# EAGLE board speech process (EAGLE 7.6.0)
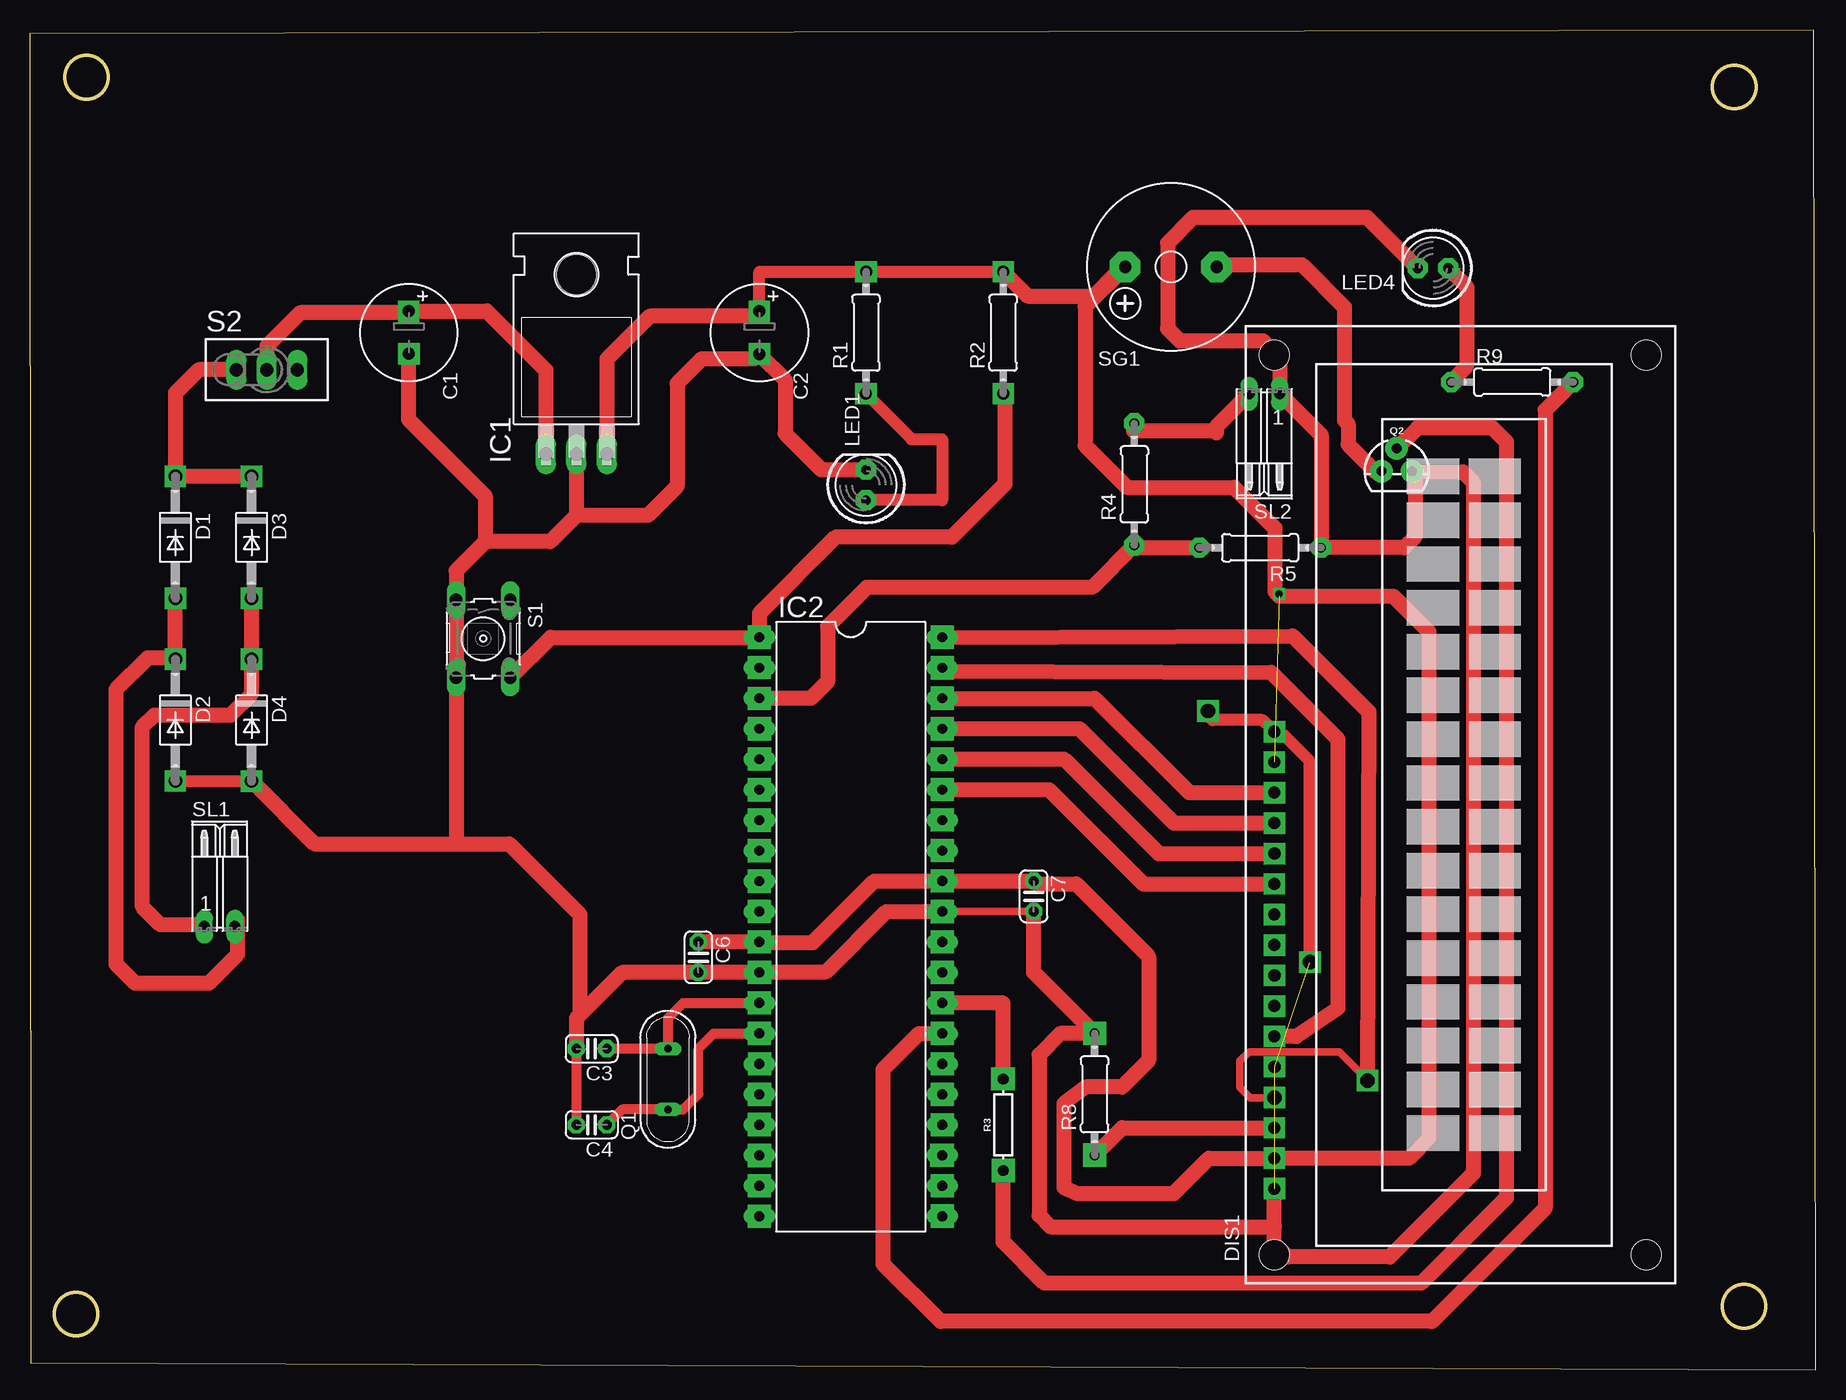
[diagram p0: board, top side]

Size 148.82 x 111.67 mm. Coordinates in mm from the lower left corner, seen from the top.
Outline: 0.08,0.55 148.82,0 148.63,111.67 0,111.36 0.08,0.55
Outline: circle at 4.71,107.74 radius 1.8
Outline: circle at 3.84,4.63 radius 1.8
Outline: circle at 142.84,5.27 radius 1.8
Outline: circle at 142.01,106.91 radius 1.8
Copper layers (1*16): Top 0.035mm / dielectric 1.5mm / Bottom 0.035mm
Design rules "default": minimum track width 10mil, minimum drill 24mil, track to track 8mil, track to pad 8mil, pad to pad 8mil, via to via 8mil, smd to smd 8mil, copper to edge 40mil, drill to drill 8mil, minimum pad ring 10mil, minimum via ring 8mil, stop-mask expansion 4mil, vias tented up to drill 0mil, thermal gap 10mil

## Footprints (pad centres in the part's own frame; a part is rotated, then mirrored left to right if it is on the bottom)
E3,5-8 = drill 0.813 pad 1.6: + -1.778,0 | drill 0.813 pad 1.6 octagon: - 1.778,0
C025-024X044 = drill 0.813 pad 1.422 octagon: 1 -1.27,0; 2 1.27,0
DO41-10 = drill 1.118: A 5.08,0; C -5.08,0
TUXGR_16X2_R2 = drill 1 pad 1.676: 1 -32,15.5; 2 -29.46,15.5; 3 -26.92,15.5; 4 -24.38,15.5; 5 -21.84,15.5; 6 -19.3,15.5; 7 -16.76,15.5; 8 -14.22,15.5; 9 -11.68,15.5; 10 -9.14,15.5; 11 -6.6,15.5; 12 -4.06,15.5; 13 -1.52,15.5; 14 1.02,15.5; 15 3.56,15.5; 16 6.1,15.5 | hole 2.5: -37.5,-15.5; 37.5,-15.5; -37.5,15.5; 37.5,15.5
TO220H = drill 1.118 long: 1 -2.54,-10.16; 2 0,-10.16; 3 2.54,-10.16 | hole 3.302: 0,4.826
DIL40 = drill 0.813 long: 1 -24.13,-7.62; 2 -21.59,-7.62; 3 -19.05,-7.62; 4 -16.51,-7.62; 5 -13.97,-7.62; 6 -11.43,-7.62; 7 -8.89,-7.62; 8 -6.35,-7.62; 9 -3.81,-7.62; 10 -1.27,-7.62; 11 1.27,-7.62; 12 3.81,-7.62; 13 6.35,-7.62; 14 8.89,-7.62; 15 11.43,-7.62; 16 13.97,-7.62; 17 16.51,-7.62; 18 19.05,-7.62; 19 21.59,-7.62; 20 24.13,-7.62; 21 24.13,7.62; 22 21.59,7.62; 23 19.05,7.62; 24 16.51,7.62; 25 13.97,7.62; 26 11.43,7.62; 27 8.89,7.62; 28 6.35,7.62; 29 3.81,7.62; 30 1.27,7.62; 31 -1.27,7.62; 32 -3.81,7.62; 33 -6.35,7.62; 34 -8.89,7.62; 35 -11.43,7.62; 36 -13.97,7.62; 37 -16.51,7.62; 38 -19.05,7.62; 39 -21.59,7.62; 40 -24.13,7.62
LED5MM = drill 0.813 pad 1.676 octagon: A -1.27,0; K 1.27,0
QS = drill 0.61 long: 1 -2.54,0; 2 2.54,0
TO-92 = drill 0.813 pad 1.88: 1 -1.27,0; 2 0,1.905; 3 1.27,0
0207/10 = drill 0.813 pad 1.676 octagon: 1 -5.08,0; 2 5.08,0
AXIAL-0.3 = drill 0.9 pad 1.88: P$1 -3.81,0; P$2 3.81,0
B3F-10XX = drill 1.016 long: 1 -3.251,2.261; 2 3.251,2.261; 3 -3.251,-2.261; 4 3.251,-2.261
TL3XPO = drill 1.1 pad 1.422 long: 1 -2.54,0; 2 0,0; 3 2.54,0
F/CM12P = drill 1.016 pad 2.54 octagon: + 3.81,0; - -3.81,0
02PA = drill 0.914 long: 1 -1.27,0; 2 1.27,0

## Placement (x,y rotation side)
C1  [E3,5-8]  31.57,86.44 270 top
C2  [E3,5-8]  60.78,86.44 270 top
C3  [C025-024X044]  46.81,26.75 180 top
C4  [C025-024X044]  46.81,20.4 180 top
C6  [C025-024X044]  55.7,34.37 270 top
C7  [C025-024X044]  83.64,39.45 270 top
D1  1N4004  [DO41-10]  12.11,69.38 270 top
D2  1N4004  [DO41-10]  12.11,54.14 270 top
D3  1N4004  [DO41-10]  18.46,69.38 270 top
D4  1N4004  [DO41-10]  18.46,54.14 270 top
DIS1  TUXGR_16X2_R2  [TUXGR_16X2_R2]  119.2,47.07 90 top
IC1  7805T  [TO220H]  45.54,86.44 0 top
IC2  PIC18F4550_40  [DIL40]  68.4,36.91 270 top
LED1  [LED5MM]  69.67,73.74 90 top
LED4  [LED5MM]  116.93,91.82 180 top
Q1  [QS]  53.16,24.21 90 top
Q2  600mA/40V  [TO-92]  113.89,74.89 0 top
R1  [0207/10]  69.67,86.44 90 top
R2  10k  [0207/10]  81.1,86.44 90 top
R3  10k  [AXIAL-0.3]  81.1,20.4 90 top
R4  10k  [0207/10]  92.03,73.79 90 top
R5  10k  [0207/10]  102.51,68.51 180 top
R8  10k  [0207/10]  88.72,22.94 90 top
R9  470 E  [0207/10]  123.51,82.32 0 top
S1  [B3F-10XX]  37.77,60.92 270 top
S2  TL37PO  [TL3XPO]  19.73,83.34 0 top
SG1  F/CM12P  [F/CM12P]  95.07,91.92 180 top
SL1  [02PA]  15.8,36.93 0 top
SL2  [02PA]  102.87,81.35 180 top

## Library data of the parts
C1-C4 C6 C7 IC1 LED1 LED4 R1 R2 R4 R5 R8 R9 = adafruit
D1-D4 = diode
DIS1 = display-lcd; OC_FARNELL: unknown; OC_NEWARK: unknown
IC2 = microchip; MF: MICROCHIP; MPN: PIC18F4550-I/P; OC_FARNELL: 9321357; OC_NEWARK: 74K8623
Q1 = special
Q2 = SparkFun-DiscreteSemi; PROD_ID: TRANS-09536
R3 = SparkFun-Resistors; PROD_ID: RES-12183
S1 = switch-omron; MPN: B3F-1000; OC_FARNELL: 176432; OC_NEWARK: 36M3542
S2 = switch
SG1 = buzzer; OC_FARNELL: unknown; OC_NEWARK: unknown
SL1 SL2 = con-amp-quick; OC_FARNELL: unknown; OC_NEWARK: unknown

## Nets
+5V: C2.+ C6.1 C7.1 DIS1.2 DIS1.15 IC1.3 IC2.11 IC2.32 R1.2 R2.2 SG1.+
+12V: C1.+ IC1.1 S2.2
GND: C1.- C2.- C3.2 C4.2 C6.2 C7.2 D2.A D4.A DIS1.1 DIS1.5 DIS1.16 IC1.2 IC2.12 IC2.31 LED1.K LED4.K Q2.3 R5.1 R8.2 S1.3 S1.4 SL2.1
N$2: D1.A D2.C SL1.2
N$3: D3.A D4.C SL1.1
N$5: IC2.34
N$6: LED1.A R1.1
N$8: DIS1.11 IC2.35
N$9: R4.2 SL2.2
N$10: IC2.28 R3.P$2
N$11: IC2.1 R2.1 S1.2
N$12: Q2.2 R3.P$1
N$13: DIS1.4 IC2.40
N$14: DIS1.6 IC2.39
N$15: Q2.1 SG1.-
N$16: IC2.27 R9.2
N$17: LED4.A R9.1
N$18: IC2.3 R4.1 R5.2
N$24: C4.1 IC2.14 Q1.1
N$25: C3.1 IC2.13 Q1.2
N$26: DIS1.14 IC2.38
N$27: DIS1.13 IC2.37
N$28: DIS1.12 IC2.36
N$30: DIS1.3 R8.1
N$114: D1.C D3.C S2.1

## Tracks (layer width: path | path; a pad name or v marks a point on that pad's centre or on a via)
+5V  (1 unrouted)
  Top 1.016: C2.+ 60.78,91.52 R1.2 R2.2
  Top 1.27: C6.1 IC2.11 60.83,35.59 65.24,35.59 70.37,40.72 IC2.32 C7.1 83.87,40.48 87.18,40.48 93.23,34.44 93.23,25.77 91.02,23.56 87.99,23.56 86.17,22.18 86.17,15.19 87.28,14.68 95.32,14.68 98.24,17.61 DIS1.2 114.92,17.61 116.57,19.26 116.57,61.52 113.62,64.47 104.09,64.47 103.73,64.83 103.73,70.15 100.35,73.52 91.43,73.52 87.93,77.03 87.93,88.59 SG1.+ 91.53,91.92 91.85,91.6 90.74,91.6 88.63,89.48 83.13,89.48 R2.2 | C2.+ 60.36,87.79 51.63,87.79 48.08,84.25 IC1.3
+12V
  Top 1.27: S2.2 19.73,85.32 22.51,88.1 31.45,88.1 C1.+ 31.6,88.25 38.07,88.25 43,83.32 IC1.1
GND  (2 unrouted)
  Top 0.61: IC2.31 C7.2
  Top 0.813: C3.2 C4.2
  Top 1.016: D2.A D4.A | 106.59,33.91 106.59,50.77 104.44,52.92 103.94,52.92 DIS1.16 102.88,53.98 102.85,53.98 102.7,54.13 98.52,54.13 98.2,54.45 98.2,54.89
  Top 1.27: 45.82,29.57 49.35,33.1 C6.2 IC2.12 60.84,33.16 66.35,33.16 71.37,38.18 IC2.31 | 45.82,29.57 45.54,29.29 C3.2 | C7.2 83.64,33.1 R8.2 88.7,28.01 85.85,28.01 84.1,26.25 84.1,12.84 85.02,11.91 103.7,11.91 | LED1.K 65.94,75.01 62.93,78.02 62.93,82.51 C2.- 60.35,84.24 55.95,84.24 53.93,82.21 53.93,73.63 51.5,71.2 45.53,71.2 | D4.A 23.7,43.82 35.5,43.82 | 35.5,43.82 39.93,43.82 45.82,37.92 45.82,29.57 | 103.7,11.91 103.7,10.48 104.79,9.38 113.32,9.38 120.28,16.34 120.28,73.97 119.43,74.81 115.24,74.81 Q2.3 115.42,74.63 115.42,69.4 114.52,68.51 R5.1 107.59,77.9 SL2.1 104.14,84.36 102.73,85.76 95.8,85.76 94.79,86.77 94.79,93.91 96.9,96.02 111.46,96.02 LED4.K | 103.7,11.91 DIS1.1 | IC1.2 45.53,76.27 45.53,71.2 | 45.53,71.2 43.35,69.02 37.92,69.02 | 37.92,69.02 35.51,66.6 S1.3 S1.4 35.5,43.82 | C1.- 31.54,84.63 31.54,79.21 37.92,72.83 37.92,69.02
N$1  (via drill 0.6)
  other vias: 104.09,64.65
N$2
  Top 1.27: D1.A D2.C 12,59.33 9.81,59.33 7.16,56.68 7.16,33.81 8.75,32.22 14.93,32.22 17.31,34.61 17.31,37.52 17.07,37.28 SL1.2
N$3
  Top 1.27: D3.A D4.C 18.46,56.33 16.69,54.56 10.34,54.56 9.36,53.59 9.36,38.58 10.87,37.08 14.38,37.08 SL1.1
N$6
  Top 1.016: R1.1 73.48,77.55 76.02,77.55 76.02,72.47 LED1.A
N$8
  Top 1.27: IC2.35 84.91,48.34 92.78,40.47 DIS1.11
N$9
  Top 1.27: SL2.2 98.86,78.61 98.86,78.09 98.72,78.23 91.95,78.23 92.03,78.31 R4.2
N$10
  Top 1.27: R3.P$2 81.1,30.56 IC2.28
N$11
  Top 1.27: S1.2 43.4,61.04 IC2.1 60.78,63.04 67.12,69.38 76.83,69.38 81.25,73.8 81.25,81.21 R2.1
N$12
  Top 1.27: Q2.2 115.63,78.53 121.85,78.53 123.02,77.36 123.02,14.31 115.92,7.21 84.53,7.21 81.1,10.64 R3.P$1
N$13  (via drill 1.2 pad 0.25)
  Top 0.61: DIS1.4 103.66,22.65 101.7,22.65 100.82,23.53 100.82,25.72 101.6,26.5 105.81,26.5 105.82,26.49 109.09,26.49 111.45,24.13 v111.45,24.08
  Top 1.27: IC2.40 105.22,61.17 111.57,54.82 v111.45,24.08
N$14
  Top 1.27: IC2.39 76.27,58.24 103.43,58.12 109,52.55 109,30.11 105.52,27.77 DIS1.6
N$15
  Top 1.27: SG1.- 99.07,92.1 106.02,92.1 109.53,88.58 109.53,79.12 109.83,78.82 109.83,77.11 112.05,74.89 Q2.1
N$16
  Top 1.27: R9.2 126.26,79.99 126.26,13.43 116.85,4.01 75.88,4.01 71.1,8.79 71.1,25.02 74.1,28.02 IC2.27
N$17
  Top 1.27: LED4.A 119.71,90.31 119.71,83.65 118.44,82.37 R9.1
N$18
  Top 1.27: R5.2 92.23,68.51 R4.1 88.51,65.2 69.72,65.2 66.46,61.94 66.46,57.35 65.07,55.96 IC2.3
N$24
  Top 0.813: C4.1 49.35,21.67 Q1.1 54.43,21.67 55.7,22.94 55.7,26.75 56.97,28.02 IC2.14
N$25
  Top 0.813: C3.1 Q1.2 53.16,29.29 54.43,30.56 IC2.13
N$26
  Top 1.27: IC2.38 88.72,55.96 96.59,48.09 DIS1.14
N$27
  Top 1.27: IC2.37 87.45,53.42 95.32,45.55 DIS1.13
N$28
  Top 1.27: IC2.36 86.18,50.88 94.05,43.01 DIS1.12
N$29  (via drill 1.2 pad 0.81)
  other vias: 103.7,22.68
N$30
  Top 1.27: R8.1 91.01,20.15 DIS1.3
N$31  (via drill 1.2 pad 0.81)
  other vias: 106.65,33.96
N$34  (via drill 1.2 pad 0.81)
  other vias: 98.17,54.89
N$35  (via drill 1 pad 1.78)
  other vias: 103.7,15.07
N$36  (via drill 1 pad 1.78)
  other vias: 103.69,17.61
N$37  (via drill 1 pad 1.78)
  other vias: 103.69,20.15
N$38  (via drill 1 pad 1.78)
  other vias: 103.71,25.23
N$39  (via drill 1 pad 1.78)
  other vias: 103.7,27.77
N$40  (via drill 1 pad 1.78)
  other vias: 103.7,30.29
N$41  (via drill 1 pad 1.78)
  other vias: 103.72,32.85
N$42  (via drill 1 pad 1.78)
  other vias: 103.7,35.38
N$43  (via drill 1 pad 1.78)
  other vias: 103.68,37.92
N$44  (via drill 1 pad 1.78)
  other vias: 103.69,40.48
N$45  (via drill 1 pad 1.78)
  other vias: 103.71,43.01
N$46  (via drill 1 pad 1.78)
  other vias: 103.69,45.55
N$47  (via drill 1 pad 1.78)
  other vias: 103.7,48.09
N$48  (via drill 1 pad 1.78)
  other vias: 103.69,50.63
N$49  (via drill 1 pad 1.78)
  other vias: 103.69,53.16
N$52  (via drill 1 pad 1.78)
  other vias: 81.1,81.35
N$53  (via drill 1 pad 1.78)
  other vias: 81.1,91.52
N$54  (via drill 1 pad 1.78)
  other vias: 69.67,91.52
N$55  (via drill 1 pad 1.78)
  other vias: 69.66,81.36
N$56  (via drill 1 pad 1.78)
  other vias: 60.78,88.22
N$57  (via drill 1 pad 1.78)
  other vias: 60.79,84.66
N$58  (via drill 1 pad 1.78)
  other vias: 31.56,88.22
N$59  (via drill 1 pad 1.78)
  other vias: 31.57,84.67
N$60  (via drill 1 pad 1.78)
  other vias: 18.46,74.46
N$61  (via drill 1 pad 1.78)
  other vias: 18.47,64.3
N$62  (via drill 1 pad 1.78)
  other vias: 18.47,59.21
N$63  (via drill 1 pad 1.78)
  other vias: 18.47,49.05
N$64  (via drill 1 pad 1.78)
  other vias: 12.11,49.06
N$65  (via drill 1 pad 1.78)
  other vias: 12.12,64.3
N$66  (via drill 1 pad 1.78)
  other vias: 12.1,74.45
N$67  (via drill 1 pad 1.78)
  other vias: 12.11,59.21
N$68  (via drill 0.8 pad 1.93)
  other vias: 60.77,61.04
N$69  (via drill 0.8 pad 1.93)
  other vias: 60.78,58.51
N$70  (via drill 0.8 pad 1.93)
  other vias: 60.78,55.95
N$71  (via drill 0.8 pad 1.93)
  other vias: 60.79,53.41
N$72  (via drill 0.8 pad 1.93)
  other vias: 60.79,50.89
N$73  (via drill 0.8 pad 1.93)
  other vias: 60.77,48.34
N$74  (via drill 0.8 pad 1.93)
  other vias: 60.78,45.79
N$75  (via drill 0.8 pad 1.93)
  other vias: 60.77,43.25
N$76  (via drill 0.8 pad 1.93)
  other vias: 60.78,40.72
N$77  (via drill 0.8 pad 1.93)
  other vias: 60.78,38.18
N$78  (via drill 0.8 pad 1.93)
  other vias: 60.78,35.64
N$79  (via drill 0.8 pad 1.93)
  other vias: 60.79,33.11
N$80  (via drill 0.8 pad 1.93)
  other vias: 60.78,30.57
N$81  (via drill 0.8 pad 1.93)
  other vias: 60.78,28.01
N$82  (via drill 0.8 pad 1.93)
  other vias: 60.8,25.48
N$83  (via drill 0.8 pad 1.93)
  other vias: 60.79,22.95
N$84  (via drill 0.8 pad 1.93)
  other vias: 60.77,20.41
N$85  (via drill 0.8 pad 1.93)
  other vias: 60.79,17.84
N$86  (via drill 0.8 pad 1.93)
  other vias: 60.78,15.32
N$87  (via drill 0.8 pad 1.93)
  other vias: 60.78,12.78
N$90  (via drill 0.8 pad 1.93)
  other vias: 76.02,12.79
N$91  (via drill 0.8 pad 1.93)
  other vias: 76.02,15.31
N$92  (via drill 0.8 pad 1.93)
  other vias: 76.01,17.86
N$93  (via drill 0.8 pad 1.93)
  other vias: 76.02,20.4
N$94  (via drill 0.8 pad 1.93)
  other vias: 76.02,22.94
N$95  (via drill 0.8 pad 1.93)
  other vias: 76.01,25.48
N$96  (via drill 0.8 pad 1.93)
  other vias: 76.01,28.02
N$97  (via drill 0.8 pad 1.93)
  other vias: 76.01,30.56
N$98  (via drill 0.8 pad 1.93)
  other vias: 76.01,33.11
N$99  (via drill 0.8 pad 1.93)
  other vias: 76.01,35.65
N$100  (via drill 0.8 pad 1.93)
  other vias: 76.02,38.17
N$101  (via drill 0.8 pad 1.93)
  other vias: 76.02,40.73
N$102  (via drill 0.8 pad 1.93)
  other vias: 76.01,43.26
N$103  (via drill 0.8 pad 1.93)
  other vias: 76.01,45.81
N$104  (via drill 0.8 pad 1.93)
  other vias: 76.02,48.35
N$105  (via drill 0.8 pad 1.93)
  other vias: 76.02,50.88
N$106  (via drill 0.8 pad 1.93)
  other vias: 76.01,53.42
N$107  (via drill 0.8 pad 1.93)
  other vias: 76.02,55.96
N$108  (via drill 0.8 pad 1.93)
  other vias: 76.02,58.5
N$109  (via drill 0.8 pad 1.93)
  other vias: 76.01,61.04
N$110  (via drill 0.8 pad 1.93)
  other vias: 88.72,28.01
N$111  (via drill 0.8 pad 1.93)
  other vias: 88.72,17.87
N$112  (via drill 0.8 pad 1.93)
  other vias: 81.09,24.22
N$113  (via drill 0.8 pad 1.93)
  other vias: 81.1,16.59
N$114
  Top 1.27: D3.C D1.C 12.11,81.41 14.05,83.35 S2.1